# EAGLE board hobbyLights (EAGLE 7.6.0)
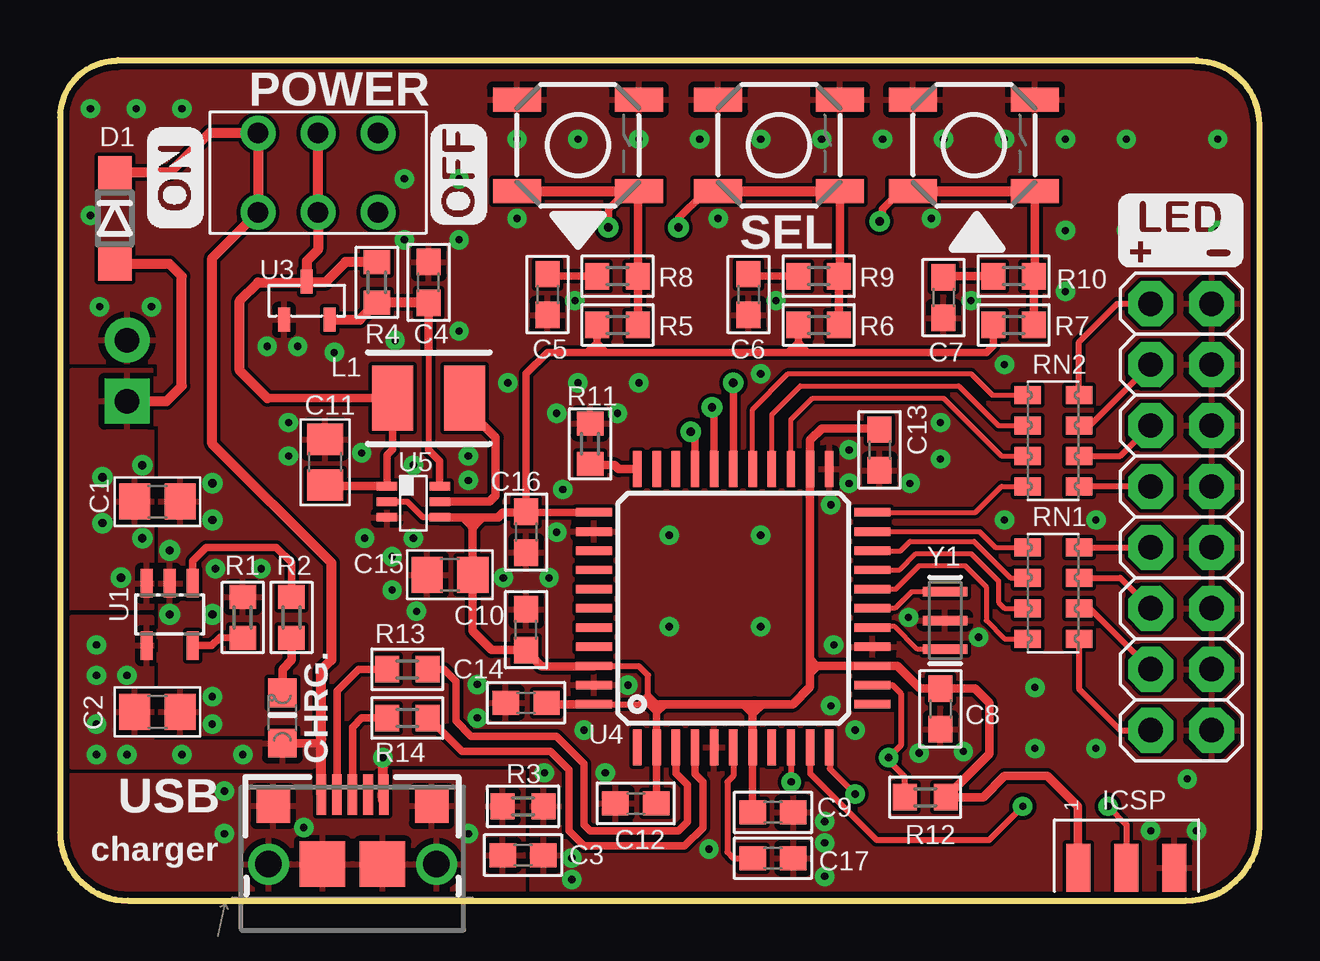
[diagram p0: board, top side]
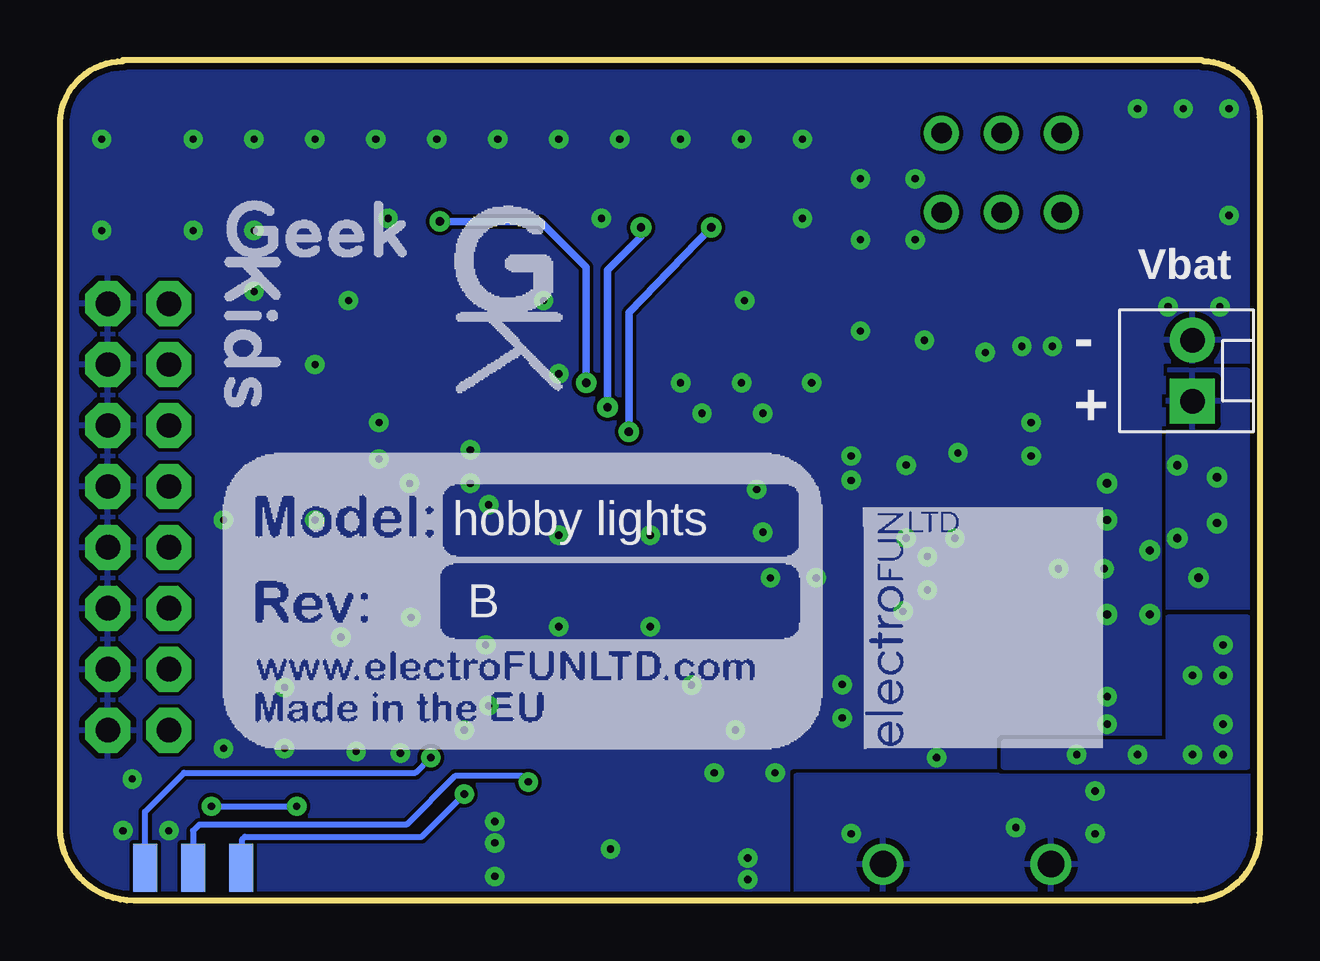
[diagram p1: board, bottom side, seen from below]

Size 50 x 35.05 mm. Coordinates in mm from the lower left corner, seen from the top.
Outline: 47.36,35 arc-90 50,32.36 50,3.08 arc-90 46.92,0 2.84,0 arc-90 0,2.84 0,32.65 arc-90 2.35,35
Outline: 2.41,35.05 47.37,35.05
Copper layers (1*16): Top 0.035mm / dielectric 1.5mm / Bottom 0.035mm
Design rules "myDesignRules *": minimum track width 8mil, minimum drill 0.3mm, track to track 6mil, track to pad 6mil, pad to pad 6mil, via to via 6mil, smd to smd 6mil, copper to edge 10mil, drill to drill 8mil, minimum pad ring 12mil, minimum via ring 10mil, stop-mask expansion 4mil, vias tented up to drill 25mil, thermal gap 10mil
Net classes: 1 vcc: width 0.203 mm, clearance 0.203 mm to class 0, clearance 0.203 mm

## Footprints (pad centres in the part's own frame; a part is rotated, then mirrored left to right if it is on the bottom)
C0805 = smd 1.3 x 1.5: 1 -0.95,0; 2 0.95,0
C0603 = smd 1.1 x 1: 1 -0.85,0; 2 0.85,0
CHIPLED_0805 = smd 1.2 x 1.2: A 0,-1.05; C 0,1.05
SOD123 = smd 1.4 x 1.4: A 1.9,0; C -1.9,0
2X8 = drill 1.016 pad 1.88 octagon: 1 0,0; 2 0,2.54; 3 2.54,0; 4 2.54,2.54; 5 5.08,0; 6 5.08,2.54; 7 7.62,0; 8 7.62,2.54; 9 10.16,0; 10 10.16,2.54; 11 12.7,0; 12 12.7,2.54; 13 15.24,0; 14 15.24,2.54; 15 17.78,0; 16 17.78,2.54
SPARKFUN_MOLEX-1X2 = drill 1.016 pad 1.88 square: 1 0,0 | drill 1.016 pad 1.88: 2 2.54,0
SRN3015 = smd 2.7 x 1.7: 1 0,1.5; 2 0,-1.5
R0603 = smd 1 x 1.1: 1 -0.85,0; 2 0.85,0
EXBS8V = smd 0.75 x 1.1: 1 -1.905,-1.07; 2 -0.635,-1.07; 3 0.635,-1.07; 4 1.905,-1.07; 5 1.905,1.07; 6 0.635,1.07; 7 -0.635,1.07; 8 -1.905,1.07
SPARKFUN_TACTILE_SWITCH_SMD = smd 2 x 1: 1 -2.54,1.905; 2 2.54,1.905; 3 -2.54,-1.905; 4 2.54,-1.905
SOT23-5 = smd 0.5 x 1.2: 1 -0.95,-1.3; 2 0,-1.3; 3 0.95,-1.3; 4 0.95,1.3; 5 -0.95,1.3
SWITCH-JS202011 = drill 0.85: P1 0,-1.65; P2 2.5,-1.65; P3 5,-1.65; P4 0,1.65; P5 2.5,1.65; P6 5,1.65
SSOP3 = smd 0.5 x 1: 1 -0.95,-0.8; 2 0.95,-0.8; 3 0,0.8
ADAFRUIT_TQFP44 = smd 1.5 x 0.35: 1 -5.8,4; 2 -5.8,3.2; 3 -5.8,2.4; 4 -5.8,1.6; 5 -5.8,0.8; 6 -5.8,0; 7 -5.8,-0.8; 8 -5.8,-1.6; 9 -5.8,-2.4; 10 -5.8,-3.2; 11 -5.8,-4; 23 5.8,-4; 24 5.8,-3.2; 25 5.8,-2.4; 26 5.8,-1.6; 27 5.8,-0.8; 28 5.8,0; 29 5.8,0.8; 30 5.8,1.6; 31 5.8,2.4; 32 5.8,3.2; 33 5.8,4 | smd 0.35 x 1.5: 12 -4,-5.8; 13 -3.2,-5.8; 14 -2.4,-5.8; 15 -1.6,-5.8; 16 -0.8,-5.8; 17 0,-5.8; 18 0.8,-5.8; 19 1.6,-5.8; 20 2.4,-5.8; 21 3.2,-5.8; 22 4,-5.8; 34 4,5.8; 35 3.2,5.8; 36 2.4,5.8; 37 1.6,5.8; 38 0.8,5.8; 39 0,5.8; 40 -0.8,5.8; 41 -1.6,5.8; 42 -2.4,5.8; 43 -3.2,5.8; 44 -4,5.8
DCK = smd 0.35 x 0.85: 1 -0.65,-1.1; 2 0,-1.1; 3 0.65,-1.1; 4 0.65,1.1; 5 0,1.1; 6 -0.65,1.1
ICSP_SMD = smd 1 x 2: 5V -2,1; GND 2,1; MOSI 0,1 | smd 1 x 2 bottom: MISO -2,1; RESET 2,1; SCK 0,1
USB_MICRO_B = smd 0.4 x 1.7: D+ 0,2.9; D- -0.65,2.9; GND 1.3,2.9; ID 0.65,2.9; VBUS -1.3,2.9 | drill 1.1: S1 -3.5,0; S4 3.5,0 | smd 1.9 x 1.9: S2 -1.25,0; S3 1.25,0 | smd 1.4 x 1.4: S5 -3.3,2.425; S6 3.3,2.425
RESONATOR-SMD = smd 0.4 x 1.85: 1 -1.2,0; 2 0,0; 3 1.2,0

## Placement (x,y rotation side)
C1  4.7uF  [C0805]  4.06,16.64 0 top
C2  4.7uF  [C0805]  4.06,7.87 0 top
C3  4.7nF  [C0603]  19.3,1.91 0 top
C4  0.1nF  [C0603]  15.37,25.78 90 top
C5  0.1nF  [C0603]  20.32,25.27 270 top
C6  0.1nF  [C0603]  28.7,25.27 270 top
C7  0.1nF  [C0603]  36.83,25.15 270 top
C8  0.1uF  [C0603]  36.7,8 270 top
C9  0.1uF  [C0603]  29.72,3.68 0 top
C10  0.1uF  [C0603]  19.43,11.3 90 top
C11  10uF  [C0805]  11.05,18.29 90 top
C12  1uF  [C0603]  24,4.06 180 top
C13  0.1uF  [C0603]  34.16,18.8 270 top
C14  0.1uF  [C0603]  19.43,8.26 180 top
C15  10uF  [C0805]  16.26,13.59 180 top
C16  0.1uF  [C0603]  19.43,15.37 270 top
C17  1uF  [C0603]  29.72,1.78 0 top
CHARGE  RED  [CHIPLED_0805]  9.27,7.62 0 top
D1  MBR0520LT  [SOD123]  2.29,28.45 270 top
J1  [2X8]  45.47,24.89 270 top
JP1  [SPARKFUN_MOLEX-1X2]  2.79,20.83 90 bottom
L1  SNR3015-100M  [SRN3015]  15.37,20.95 90 top
R1  3.3K  [R0603]  7.62,11.81 270 top
R2  470R  [R0603]  9.65,11.81 270 top
R3  1M  [R0603]  19.3,3.94 180 top
R4  470K  [R0603]  13.21,25.78 90 top
R5  10k  [R0603]  23.24,24 180 top
R6  10k  [R0603]  31.62,24 180 top
R7  10k  [R0603]  39.75,24 180 top
R8  10k  [R0603]  23.24,26.04 0 top
R9  10k  [R0603]  31.62,26.04 0 top
R10  10k  [R0603]  39.75,26.04 0 top
R11  10k  [R0603]  22.1,19.05 90 top
R12  10k  [R0603]  36.07,4.32 180 top
R13  22R  [R0603]  14.48,9.65 180 top
R14  22R  [R0603]  14.48,7.62 180 top
RN1  470  [EXBS8V]  41.4,12.83 270 top
RN2  470  [EXBS8V]  41.4,19.18 270 top
S1  microswitch  [SPARKFUN_TACTILE_SWITCH_SMD]  21.59,31.5 0 top
S2  microswitch  [SPARKFUN_TACTILE_SWITCH_SMD]  29.97,31.5 0 top
S3  microswitch  [SPARKFUN_TACTILE_SWITCH_SMD]  38.1,31.5 0 top
U1  MCP73831-2  [SOT23-5]  4.57,11.94 180 top
U2  POWER  [SWITCH-JS202011]  8.26,30.35 0 top
U3  BD48K28G  [SSOP3]  10.29,25.02 0 top
U4  ATMEGA32U4-AU  [ADAFRUIT_TQFP44]  28.07,12.19 90 top
U5  TPS61222  [DCK]  14.73,16.64 270 top
U$1  [LED_SILK]  44.13,26.42 0 top
U$2  [ON]  5.97,28.07 90 top
U$3  [OFF]  17.78,28.19 90 top
U$4  AVR_ICSP  [ICSP_SMD]  44.45,0.38 0 top
U$5  [ELECTROFUN_10X10]  16.51,6.35 0 bottom
U$6  [BOARD_REF]  43.18,6.35 0 bottom
U$7  [GEEKKIDS_S]  43.18,24 0 bottom
U$10  [BOARD_REF]  43.18,6.35 0 bottom
U$11  [GEEKKIDS_LOGO_S]  33.53,21.21 0 bottom
USB  10118193-0001LF  [USB_MICRO_B]  12.19,1.52 0 top
Y1  RESONATORSMD  [RESONATOR-SMD]  36.89,11.68 270 top

## Library data of the parts
C1-C17 R1-R14 = rcl
CHARGE = led
D1 = diode
J1 = SparkFun-Connectors
JP1 = SAVLibSAV MK-I
L1 = inductors
RN1 RN2 = resistor-dil; OC_FARNELL: unknown; OC_NEWARK: unknown
S1-S3 U4 = SAVMakerI
U1-U3 U5 U$1-U$7 U$10 U$11 USB = fmc
Y1 = sparkfun_2

## Nets
3.3V: C17.1 U4.6
A0: U4.36
A1: U4.37
A2: U4.38
A3: U4.39
A4: U4.40
A5 [vcc]: U4.41
D2/SDA: RN1.3 U4.19
D3/SCL: RN1.4 U4.18
D4: RN2.3 U4.25
D5: U4.31
D6: RN2.1 U4.27
D7: U4.1
D8: R7.1 R10.2 S3.3 S3.4 U4.28
D9: R6.1 R9.2 S2.3 S2.4 U4.29
D10: R5.1 R8.2 S1.3 S1.4 U4.30
D11: U4.12
D12: RN2.2 U4.26
D13: U4.32
D+: R14.1 U4.4
D-: R13.1 U4.3
GND: C1.2 C2.2 C3.2 C4.2 C5.2 C6.2 C7.2 C8.2 C9.2 C10.2 C11.2 C12.2 C13.2 C14.2 C15.2 C16.2 C17.2 J1.2 J1.4 J1.6 J1.8 J1.10 J1.12 J1.14 J1.16 JP1.2 R1.1 R3.1 R11.2 S1.1 S1.2 S2.1 S2.2 S3.1 S3.2 U1.2 U3.1 U4.5 U4.15 U4.23 U4.35 U4.43 U5.3 U$4.GND USB.GND Y1.2
GND-ISO: C3.1 R3.2 USB.S1 USB.S2 USB.S3 USB.S4 USB.S5 USB.S6
MISO: U4.11 U$4.MISO
MOSI: U4.10 U$4.MOSI
N$2: C5.1 R8.1
N$3: U4.16 Y1.3
N$4: R1.2 U1.5
N$5: U4.17 Y1.1
N$6: R2.1 U1.1
N$7: CHARGE.C R2.2
N$9: C6.1 R9.1
N$10: C7.1 R10.1
N$12: R11.1 U4.33
N$13: R13.2 USB.D-
N$14: R14.2 USB.D+
N$15: L1.2 U5.5
N$16: J1.15 RN1.5
N$17: J1.13 RN1.6
N$18: J1.11 RN1.7
N$19: J1.9 RN1.8
N$20: J1.1 RN2.8
N$21: J1.3 RN2.7
N$22: J1.5 RN2.6
N$23: J1.7 RN2.5
PWR_OK: C4.1 R4.1 U3.2 U5.6
RESET: R12.2 U4.13 U$4.RESET
RX-I: RN1.2 U4.20
RXLED: U4.8
SCK: U4.9 U$4.SCK
TX-O: RN1.1 U4.21
TXLED: RN2.4 U4.22
V_BATT [vcc]: C11.1 L1.1 R4.2 U2.P2 U2.P5 U3.3 U5.1
V_USB [vcc]: C2.1 CHARGE.A D1.C U1.4 U2.P1 U2.P4 USB.VBUS
VCC [vcc]: C8.1 C9.1 C10.1 C12.1 C13.1 C14.1 C15.1 C16.1 R5.2 R6.2 R7.2 R12.1 U4.2 U4.7 U4.14 U4.24 U4.34 U4.42 U4.44 U5.2 U5.4 U$4.5V
VCCINT [vcc]: C1.1 D1.A JP1.1 U1.3

## Tracks (layer width: path | path; a pad name or v marks a point on that pad's centre or on a via)
3.3V
  Top 0.254: U4.6 28.07,5.21 27.81,4.95 27.81,2.03 28.07,1.78 C17.1
D2/SDA
  Top 0.203: U4.19 35,13.79 35.69,14.48 37.97,14.48 39.12,13.34 39.12,12.45 39.37,12.19 RN1.3
D3/SCL
  Top 0.203: U4.18 34.84,12.99 35.81,13.97 37.72,13.97 38.61,13.08 38.61,11.68 39.37,10.92 RN1.4
D4
  Top 0.203: U4.25 30.47,20.05 31.37,20.95 36.83,20.95 39.24,18.54 RN2.3
D6
  Top 0.203: U4.27 28.87,20.48 30.35,21.97 37.97,21.97 38.86,21.08 RN2.1
D8  (via drill 0.35)
  Top 0.305: S3.3 35.05,29.59 34.29,28.83 34.29,28.45 v34.16,28.32 | v28.07,21.59 U4.28
  Top 0.356: S3.4 40.64,26.07 R10.2 R7.1
  Top 0.406: S3.3 S3.4
  Bottom 0.305: v34.16,28.32 29.97,28.32 28.07,26.42 v28.07,21.59
D9  (via drill 0.35)
  Top 0.305: U4.29 27.27,20.48 v27.18,20.57 | v25.78,28.07 25.78,28.45 26.8,29.46 27.3,29.46 S2.3
  Top 0.356: S2.4 32.51,26.07 R9.2 R6.1
  Top 0.406: S2.3 S2.4
  Bottom 0.305: v27.18,20.57 27.18,26.29 25.78,27.69 v25.78,28.07
D10  (via drill 0.35)
  Top 0.305: U4.30 26.47,19.38 v26.29,19.56 | v22.86,28.07 22.86,28.83 23.62,29.59
  Top 0.356: S1.4 24.09,29.55 R8.2 R5.1
  Top 0.406: S1.3 23.62,29.59 S1.4
  Bottom 0.305: v26.29,19.56 26.29,24.51 v22.86,28.07
D12
  Top 0.203: U4.26 29.67,20.27 30.86,21.46 37.47,21.46 39.12,19.81 RN2.2
D+
  Top 0.305: R14.1 15.37,7.62 16.76,6.22 20.45,6.22 21.21,5.46 21.21,2.92 21.84,2.29 26.04,2.29 26.8,3.05 26.8,4.95 26.47,5.28 U4.4
D-
  Top 0.305: U4.3 25.67,5.32 26.16,4.83 26.16,3.3 25.78,2.92 22.1,2.92 21.84,3.17 21.84,5.71 20.7,6.86 17.14,6.86 16.51,7.49 16.51,9.14 16,9.65 R13.1
GND  (via drill 0.3, 0.35)
  Top 0.254: USB.GND 13.46,4.2
  Top 0.406: 13.46,4.2 v13.46,5.97
  other vias: 4.57,11.94 6.35,11.94 6.35,15.88 6.35,17.4 4.57,14.61 6.35,7.37 6.48,13.84 6.35,8.51 35.81,6.16 37.66,6.22 8.38,13.84 31.88,2.41 31.88,3.3 35.37,11.81 36.7,19.94 36.7,18.41 32.13,16.51 27.43,28.45 29.84,25.02 21.46,25.02 21.59,21.59 22.73,5.33 20.95,17.14 20.7,15.37 20.38,13.46 18.48,13.46 17.4,9.02 17.4,7.62 38.29,10.99 25.4,15.24 29.21,15.24 29.21,11.43 25.4,11.43 33.15,7.11 32.13,8.13 21.84,7.11 37.97,25.02 14.35,27.56 19.05,31.75 21.59,31.75 24.13,31.75 26.67,31.75 31.75,31.75 34.29,31.75 36.83,31.75 39.37,31.75 41.91,31.75 44.45,27.94 48.26,27.94 48.26,31.75 44.45,31.75 41.91,25.4 29.21,31.75 16.64,27.56 36.32,28.45 19.05,28.45 1.27,33.02 3.17,33.02 5.08,33.02 1.27,28.57 3.81,24.77 1.65,24.77 46.99,5.08 43.18,6.35 40.64,8.89 40.64,6.35 21.34,1.78 21.34,0.89 43.18,15.88 39.37,15.88 20.19,5.33 23.67,8.99 45.47,2.92 47.37,2.92 27.05,2.16 24.13,21.59 23.24,20.32 20.7,20.32 13.84,12.95 8.64,23.11 14.86,12.06 13.84,14.35 9.91,23.11 14.73,15.11 32.26,10.67 32.89,18.8 12.7,15.11 9.53,18.54 16.64,30.1 14.35,30.1 16.64,23.75 18.67,21.59 13.97,23.37 11.43,22.86 17.02,18.54 17.02,17.53 14.73,18.16 12.57,18.67 31.88,1.02 9.53,19.94 41.91,27.94 32.89,17.4 35.43,17.4 39.37,22.35 29.21,21.97
  pour Top (rank 3): 0.51,0.25 0.51,34.8 50.8,34.8 50.8,0.25
  pour Bottom (rank 3): 0.51,0.25 0.51,34.8 50.8,34.8 50.8,0.25
GND-ISO  (via drill 0.3)
  other vias: 6.86,4.57 6.86,2.79 10.16,3.05 17.02,2.79
  pour Top (rank 2): 0,0.25 19.3,0.25 19.3,5.33 0,5.33
  pour Bottom (rank 2): 0,0.25 0,5.21 19.3,5.21 19.3,0.25
MISO  (via drill 0.3)
  Top 0.254: U4.11 32.09,6.39 32.09,5.5 v33.15,4.45
  Bottom 0.254: U$4.MISO 42.42,1.29 42.42,2.54 42.29,2.67 34.92,2.67 v33.15,4.45
MOSI  (via drill 0.3)
  Top 0.254: U4.10 31.27,5.31 34.04,2.54 38.73,2.54 v40.13,3.94 | v43.69,3.94 44.45,3.17 U$4.MOSI
  Bottom 0.254: v43.69,3.94 v40.13,3.94
N$2
  Top 0.305: R8.1 20.41,26.04 C5.1
N$3
  Top 0.203: Y1.3 35.74,10.48 34.8,11.43 33.91,11.43 U4.16
N$4
  Top 0.305: R1.2 6.67,10.99 6.32,10.64 U1.5
N$5
  Top 0.203: Y1.1 35.49,12.88 34.8,12.19 U4.17
N$6
  Top 0.305: U1.1 5.52,14.16 6.1,14.73 9.02,14.73 9.65,14.1 R2.1
N$7
  Top 0.356: R2.2 9.65,10.03 9.27,9.65 CHARGE.C
N$9
  Top 0.305: R9.1 28.79,26.04 C6.1
N$10
  Top 0.356: R10.1 36.87,26.04 C7.1
N$12
  Top 0.356: U4.33 23.28,17.99 23.11,18.16 22.14,18.16 R11.1
N$13
  Top 0.305: USB.D- 11.54,8.75 12.45,9.65 R13.2
N$14
  Top 0.305: USB.D+ 12.19,7.24 12.57,7.62 R14.2
N$15
  Top 0.356: U5.5 17.91,16.64 18.16,16.89 18.16,19.3 17.53,19.94 17.53,20.3 L1.2
N$16
  Top 0.254: RN1.5 42.47,8.84 44.2,7.11 J1.15
N$17
  Top 0.254: RN1.6 42.93,12.19 J1.13
N$18
  Top 0.254: RN1.7 44.2,13.46 J1.11
N$19
  Top 0.254: RN1.8 J1.9
N$20
  Top 0.254: RN2.8 42.47,23.3 44.07,24.89 J1.1
N$21
  Top 0.254: RN2.7 42.93,19.81 J1.3
N$22
  Top 0.254: RN2.6 44.2,18.54 J1.5
N$23
  Top 0.254: J1.7 RN2.5
PWR_OK
  Top 0.254: 15.37,22.86 15.37,19.05
  Top 0.305: 15.37,19.05 15.37,18.8 15.83,18.33 U5.6
  Top 0.356: 15.37,22.86 C4.1
  Top 0.406: C4.1 R4.1 12.5,24.22 U3.2
RESET  (via drill 0.3)
  Top 0.254: U4.13 34.7,8.99 35.05,8.64 35.05,6.48 v34.54,5.97 34.54,5.84 35.22,5.17 R12.2
  Bottom 0.254: U$4.RESET 46.45,3.71 44.83,5.33 35.18,5.33 v34.54,5.97
RX-I
  Top 0.203: U4.20 35.04,14.59 35.43,14.99 38.1,14.99 39.62,13.46 RN1.2
SCK  (via drill 0.3)
  Top 0.254: U4.9 30.47,6.36 | 30.47,6.36 30.48,6.35 | 30.47,6.36 30.47,5.22 v30.48,4.95
  Bottom 0.254: v30.48,4.95 30.73,5.21 33.53,5.21 35.56,3.17 44.2,3.17 44.45,2.92 U$4.SCK
TX-O
  Top 0.203: U4.21 38.33,15.39 38.99,14.73 RN1.1
TXLED
  Top 0.203: U4.22 38.16,16.19 39.24,17.27 RN2.4
V_BATT
  Top 0.305: 13.87,20.89 13.87,18.82 13.63,18.59 U5.1
  Top 0.356: 8.64,20.95 L1.1 | U5.1 11.1,17.29 C11.1
  Top 0.406: U2.P5 U2.P2 10.76,27.14 10.29,26.67 U3.3 | 8.64,20.95 7.49,22.1 7.49,25.02 8.26,25.78 10.25,25.78 U3.3 | R4.2 11.9,26.63 11.05,25.78 10.32,25.78 U3.3 | 13.87,20.89 L1.1
V_USB  (via drill 0.3)
  Top 0.356: CHARGE.A 10.73,6.57 10.89,6.73
  Top 0.406: D1.C 4.57,30.35 6.22,32 U2.P4 U2.P1 6.35,26.8 6.35,19.05 11.3,14.1 11.3,10.03 10.89,9.62 10.89,6.73 USB.VBUS
  other vias: 1.52,10.67 1.52,9.4 1.52,7.37 1.52,6.1 2.79,6.1 5.08,6.1 7.62,6.1 2.79,9.4
  pour Top: 0.51,5.59 0.51,11.81 3.81,11.81 3.81,6.6 10.92,6.6 10.92,5.59
  pour Bottom: 0.51,5.59 0.51,11.81 3.81,11.81 3.81,6.6 10.67,6.6 10.67,5.59
VCC
  Top 0.254: 24.87,4.25 C12.1 | 24.38,8.19 24.51,8.51 24.51,9.4 24.13,9.78 22.25,9.78 | U4.44 24.38,8.19 | 24.38,8.19 24.64,8.19 24.64,8.13 | 42.42,1.41 U$4.5V | 31.24,10.16 31.62,9.78 31.56,9.72 | 31.24,9.4 31.56,9.72 | 31.41,9.79 31.48,9.79 31.56,9.72 | 28.83,7.87 28.96,7.87 | 28.87,8.1 28.87,8.04 28.77,7.94 | U5.2 14.48,16.64 15.13,15.99 U5.4
  Top 0.305: 24.87,4.25 U4.2 24.87,8.17 24.89,8.19 | C10.1 19.43,10.41 | 22.25,9.78 U4.42 | 20.34,8.19 C14.1 | 31.41,9.79 31.27,9.65 | 28.87,8.1 28.96,8.19 | U4.34 19.43,16.19 C16.1 19.43,21.97 20.32,22.86 21.97,22.86 | 25.15,8.13 24.89,7.87 24.64,8.13 | C9.1 U4.7 | 18.27,15.99 18.29,16 | 17.21,15.92 17.27,15.99 | 17.14,15.62 16.76,16 | 17.27,15.62 17.65,16 | 30.73,22.86 30.35,22.86 | 30.35,22.86 22.76,22.86 | 22.35,22.86 21.97,22.86 | R6.2 30.77,22.9 30.73,22.86 | R5.2 22.39,22.9 22.35,22.86 | 21.97,22.86 22.38,23.24 22.76,22.86 | 22.35,22.86 22.76,22.86 | 30.35,22.86 30.79,23.27 31.17,22.86 | 30.73,22.86 31.17,22.86 | 31.17,22.86 38.61,22.86 38.9,23.15 R7.2
  Top 0.356: 19.43,10.41 20.07,9.78 22.25,9.78 | U4.44 20.34,8.19 | C10.1 18,10.45 17.21,11.24 C15.1 17.21,15.75 | 31.41,9.79 U4.14 34.91,9.79 35.85,8.85 C8.1 38.14,8.85 38.73,8.26 38.73,6.13 R12.1 38.48,4.32 39.37,5.21 41.15,5.21 42.42,3.94 42.42,1.41 | 24.64,8.19 24.89,8.19 28.96,8.19 30.54,8.19 31.27,8.91 31.27,9.65 U4.24 31.27,19.2 31.75,19.68 34.12,19.68 C13.1 | U4.7 28.87,8.1 | 24.77,8.26 24.51,8.51 24.26,8.26 | 28.83,7.87 28.77,7.94 28.57,8.13 | 28.96,7.87 29.21,8.13 | 19.43,16.19 18.48,16.19 18.29,16 | U5.4 17.27,15.99 18.27,15.99 | 17.21,15.75 17.21,15.92 | 17.14,15.62 17.14,15.69 17.21,15.75 | 17.27,15.62 17.27,15.68 17.21,15.75
VCCINT  (via drill 0.35)
  Top 0.406: JP1.1 4.45,20.83 5.08,21.46 5.08,26.04 4.57,26.54 2.8,26.54 D1.A
  other vias: 2.54,13.46 1.78,15.75 1.78,17.65 3.43,15.11 3.43,18.16
  pour Top (rank 2): 0.51,12.19 0.51,22.1 3.81,22.1 3.81,12.19
  pour Bottom (rank 2): 0.51,12.19 0.51,22.1 3.81,22.1 3.81,12.19

## Text on the board
tPlace: POWER | SEL | CHRG. | USB | USB | ICSP | charger
bPlace: Vbat | - | + | hobby lights | B